# Altium PCB Display_driver_PCB.PcbDoc
Units mm, origin at the board's own origin, x right, y up, seen from the top; angles counter-clockwise.
Board outline 38.1 x 14.6 mm, 2 copper layers (Top Layer, Bottom Layer), stack 0.571 mm thick; 35 components, 82 nets, 116 pads, 14 vias.
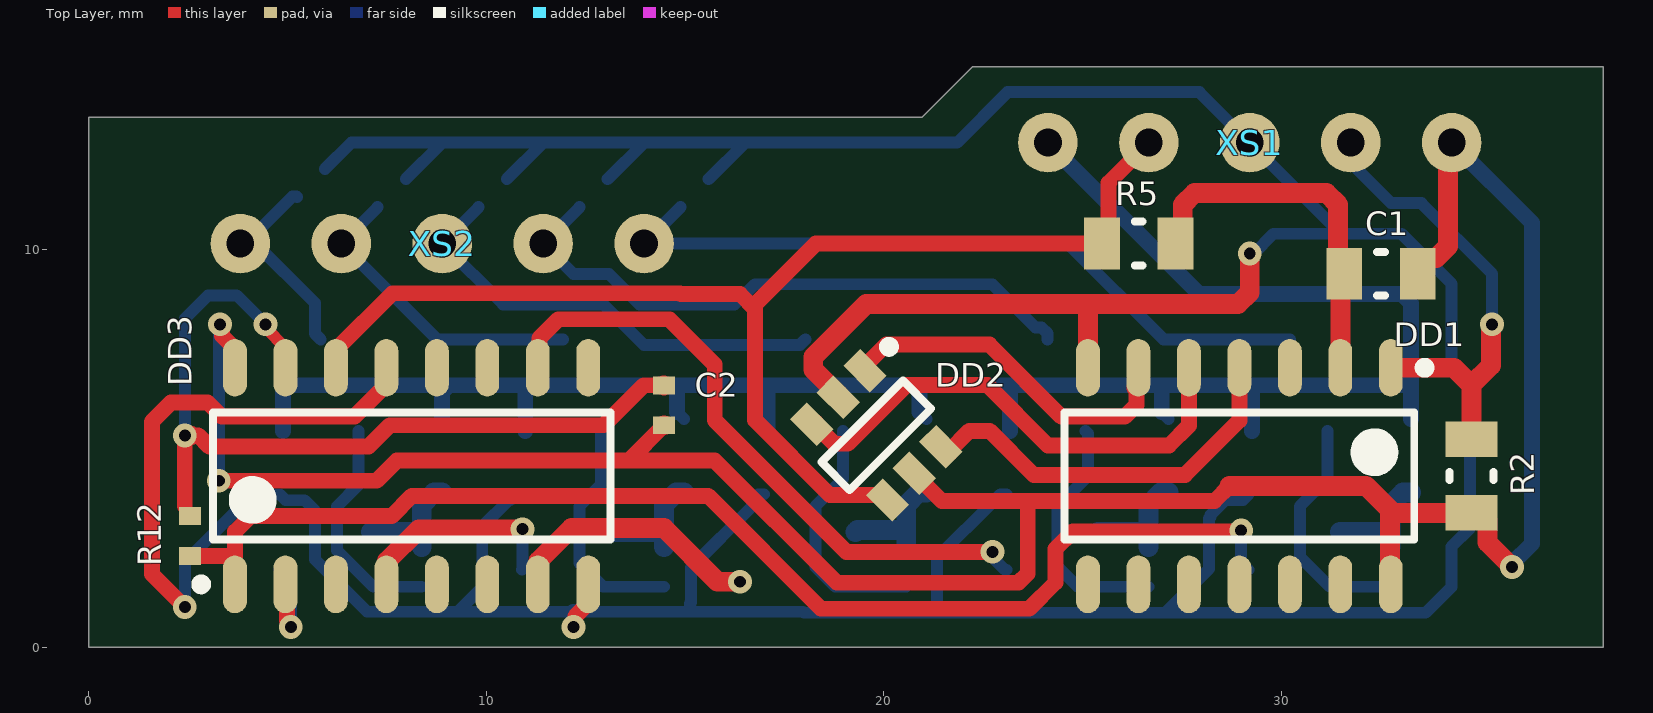
[diagram p0: Top Layer view]
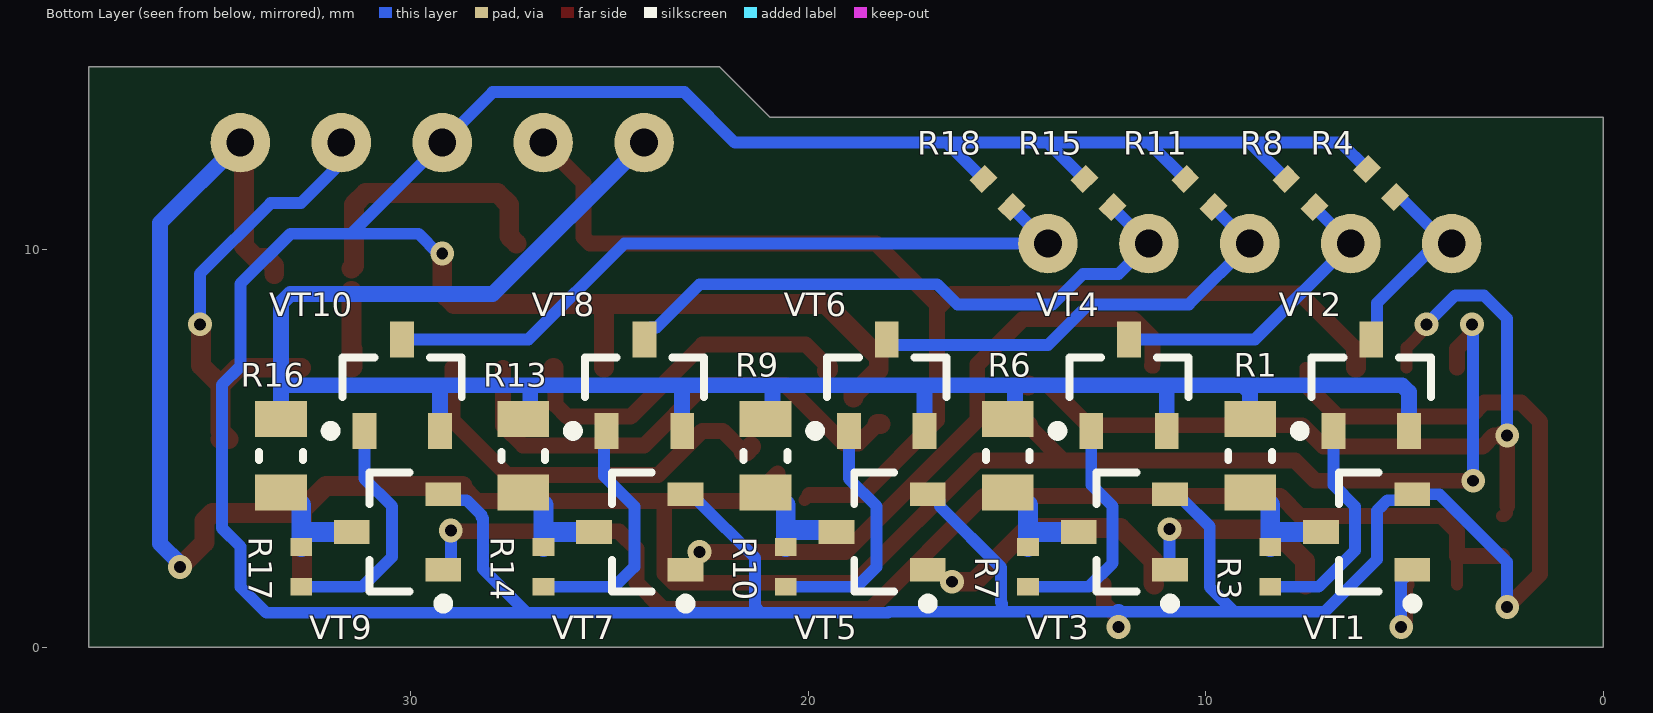
[diagram p1: Bottom Layer view, seen from below]

## Layer stack, top to bottom
Top Solder: solder mask 0.0102, Solder Resist, Dk 3.5
Top Layer: signal copper 0.0356
Dielectric 1: dielectric 0.5, FR-4, Dk 4.8
Bottom Layer: signal copper 0.0356
Bottom Solder: solder mask 0.0102, Solder Resist, Dk 3.5

## Board outline
0,0 0,13.335 20.32,13.335 20.955,13.335 22.225,14.605 38.1,14.605 38.1,0
cut-out: -25.4,-27.94 -25.146,-27.94 -25.146,-27.686 -25.4,-27.686
cut-out: -25.4,-27.94 -25.146,-27.94 -25.146,-27.686 -25.4,-27.686
cut-out: -25.4,-27.94 -25.146,-27.94 -25.146,-27.686 -25.4,-27.686

## Design rules (kind name [scope] priority, off if disabled: settings)
Clearance [All] p1: gap=0.254 ignorepadtopadclearanceinfootprint=FALSE
FanoutControl Fanout_LCC [All] p1 off: bgadir=Out bgaviamode=Centered fanoutstyle=Auto fanoutdirection=Alternating viagrid=0.025 // Protel DXP Scope 1 Expression Was: IsLCC   Fanout_LCC (Default Rule)
FanoutControl Fanout_BGA [All] p2 off: bgadir=Out bgaviamode=Centered fanoutstyle=Auto fanoutdirection=Alternating viagrid=0.025 // Protel DXP Scope 1 Expression Was: IsBGA   Fanout_BGA (Default Rule)
FanoutControl Fanout_SOIC [All] p3 off: bgadir=Out bgaviamode=Centered fanoutstyle=Auto fanoutdirection=Alternating viagrid=0.025 // Protel DXP Scope 1 Expression Was: IsSOIC   Fanout_SOIC (Default Rule)
FanoutControl Fanout_Default [All] p4: bgadir=Out bgaviamode=Centered fanoutstyle=Auto fanoutdirection=Alternating viagrid=0.025 // Fanout_Default (Default Rule)
FanoutControl Fanout_Small [All] p5 off: bgadir=Out bgaviamode=Centered fanoutstyle=Auto fanoutdirection=Alternating viagrid=0.025 // Protel DXP Scope 1 Expression Was: (CompPinCount < 5)   Fanout_Small (Default Rule)
PolygonConnect [All] p1: connectstyle=Relief reliefconductorwidth=0.254 reliefentries=4 polygonreliefangle="90 Angle" airgapwidth=0.254
RoutingVias [All] p1: holewidth=0.711 width=1.27 viastyle="Through Hole" minholewidth=0.711 minwidth=1.27 maxholewidth=0.711 maxwidth=1.27
SilkToSolderMaskClearance [All] p1 off: minsilkscreentomaskgap=0.254 clearancetoexposedcopper=TRUE // Protel DXP Scope 1 Expression Was: IsPad
SolderMaskExpansion [All] p1: expansion=0.102 istentingtop=FALSE
Width [All] p1: maxlimit=1 minlimit=0.15 preferedwidth=0.4
24 further rules are at their usual default settings.

## Components (designator, comment, footprint, x,y, rotation, side; value= is the part's Value field where it differs from the comment)
C1 "C0805" CHIP-0805 32.512,9.398 r180 top
C2 "C0805" CHIP-0402 14.47,6.088 r90 top
DD1 "CD4024" SOIC-14 28.948,4.31 r270 top
DD2 "74LVC1G11" SOT23-6 19.812,5.334 r315 top
DD3 "CD4017" SOIC-16 8.12,4.31 r90 top
R1 "R0805" CHIP-0805 8.882,4.818 r90 bottom
R2 "R0805" CHIP-0805 34.79,4.31 r270 top
R3 "R0805" CHIP-0402 8.374,2.024 r270 bottom
R4 "R0805" CHIP-0402 5.588,11.684 r225 bottom
R5 "R0805" CHIP-0805 26.416,10.16 r180 top
R6 "R0805" CHIP-0805 14.978,4.818 r90 bottom
R7 "R0805" CHIP-0402 14.47,2.024 r270 bottom
R8 "R0805" CHIP-0402 7.62,11.43 r225 bottom
R9 "R0805" CHIP-0805 21.074,4.818 r90 bottom
R10 "R0805" CHIP-0402 20.566,2.024 r270 bottom
R11 "R0805" CHIP-0402 10.16,11.43 r225 bottom
R12 "R0805" CHIP-0402 2.54,2.802 r270 top
R13 "R0805" CHIP-0805 27.17,4.818 r90 bottom
R14 "R0805" CHIP-0402 26.662,2.024 r270 bottom
R15 "R0805" CHIP-0402 12.7,11.43 r225 bottom
R16 "R0805" CHIP-0805 33.266,4.818 r90 bottom
R17 "R0805" CHIP-0402 32.758,2.024 r270 bottom
R18 "R0805" CHIP-0402 15.24,11.43 r225 bottom
VT1 "2N7000" SOT23-3 5.95,2.902 r0 bottom
VT2 "BC808" SOT23-3 5.834,6.596 r90 bottom
VT3 "2N7000" SOT23-3 12.046,2.902 r0 bottom
VT4 "BC808" SOT23-3 11.93,6.596 r90 bottom
VT5 "2N7000" SOT23-3 18.142,2.902 r0 bottom
VT6 "BC808" SOT23-3 18.026,6.596 r90 bottom
VT7 "2N7000" SOT23-3 24.238,2.902 r0 bottom
VT8 "BC808" SOT23-3 24.122,6.596 r90 bottom
VT9 "2N7000" SOT23-3 30.334,2.902 r0 bottom
VT10 "BC808" SOT23-3 30.218,6.596 r90 bottom
XS1 "Socket" SOCKET 24.13,12.7 r0 top
XS2 "Socket" SOCKET 3.81,10.16 r0 top

## Footprints (in the part's own frame and the unit in brackets; to place one, negate y for a bottom-side part, rotate by r counter-clockwise, add the part's x,y. Pads: shape width x height; smd on the part's side, far side on the other; paste and mask are expansions set on the pad)
CHIP-0402 [mm] "Chip Resistor, 2-Leads, Body 1,00x0,50mm, IPC Medium Density"
  rect 0.45x0.55 smd: 1(-0.5,0) 2(0.5,0)
  body extent -0.5,-0.25 0.5,0.25, height 0.35
CHIP-0805 [mm] "Chip Resistor, 2-Leads, Body 2,00x1,25mm, IPC Medium Density"
  rect 0.9x1.3 smd: 1(-0.925,0) 2(0.925,0)
  silkscreen extent -0.1,-0.55 0.1,0.55, body extent -1,-0.63 1,0.63, height 0.7
SOCKET [mm]
  round 1.5 hole 0.7: 1(0,0) 2(2.54,0) 3(5.08,0) 4(7.62,0) 5(10.16,0)
SOIC-14 [mm] "SOIC, 14-Leads, Body 8,65x3,90mm, Pitch 1,27mm, IPC Medium Density"
  oval 1.45x0.6 smd: 1(-2.725,3.81) 2(-2.725,2.54) 3(-2.725,1.27) 4(-2.725,0) 5(-2.725,-1.27) 6(-2.725,-2.54) 7(-2.725,-3.81) 8(2.725,-3.81) 9(2.725,-2.54) 10(2.725,-1.27) 11(2.725,0) 12(2.725,1.27) 13(2.725,2.54) 14(2.725,3.81)
  silkscreen extent -2.85,-4.4 1.6,4.79, body extent -2,-4.4 2,4.4, height 1.75
SOIC-16 [mm] "SOIC, 16-Leads, Body 9,90x3,90mm, Pitch 1,27mm, IPC Medium Density"
  oval 1.45x0.6 smd: 1(-2.725,4.445) 2(-2.725,3.175) 3(-2.725,1.905) 4(-2.725,0.635) 5(-2.725,-0.635) 6(-2.725,-1.905) 7(-2.725,-3.175) 8(-2.725,-4.445) 9(2.725,-4.445) 10(2.725,-3.175) 11(2.725,-1.905) 12(2.725,-0.635) 13(2.725,0.635) 14(2.725,1.905) 15(2.725,3.175) 16(2.725,4.445)
  silkscreen extent -2.85,-5 1.6,5.42, body extent -2,-5 2,5, height 1.75
SOT23-3 [mm] "SOT23, 3-Leads, Body 2,90x2,30mm, Pitch 0,95mm, IPC Medium Density"
  rect 0.9x0.6 smd: 1(-1.15,0.95) 2(-1.15,-0.95) 3(1.15,0)
  silkscreen extent -1.27,-1.5 0.7,1.92, body extent -0.7,-1.5 0.7,1.5, height 1.1
SOT23-6 [mm] "SOT23, 6-Leads, Body 2,85x2,80mm, Pitch 0,95mm, IPC Medium Density"
  rect 0.95x0.6 smd: 1(-1.35,0.95) 2(-1.35,0) 3(-1.35,-0.95) 4(1.35,-0.95) 5(1.35,0) 6(1.35,0.95)
  silkscreen extent -1.47,-1.45 0.5,1.92, body extent -0.88,-1.45 0.88,1.45, height 1.1

## Via types
v1: diameter 0.6, hole 0.3, Top Layer to Bottom Layer, 14 vias

## Nets (pads, with @x,y where several pads share a name; then routed paths per layer and width w, separated by ;. In a path a pad name is that pad's centre, name@x,y a point inside that pad or via, vN(x,y) a via of type N, cw(c..) or ccw(c..) an arc to the next point about the centre after c; other vN are vias at no path point)
+3V3: 
+3V3_D: C1.1 C2.1 DD1.14 DD2.5 DD3.16 R2.2 XS1.5 | length 64.1
  Top Layer w0.4: v1(3.269,4.191) 7.239,4.191 7.747,4.699 13.581,4.699 ; v1(3.302,8.128) 3.35,8.08 3.35,7.839 3.675,7.514 DD3.16 ; C2.1 13.581,4.699 ; DD2.5 21.463,3.683 23.622,3.683 ; 28.702,4.064 28.321,3.683 27.233,3.683 23.622,3.683 ; 13.581,4.699 15.748,4.699 18.823,1.624 23.388,1.624 23.622,1.859 23.622,3.683
  Top Layer w0.5: 28.702,4.064 32.131,4.064 32.81,3.385 R2.2 34.99,3.385 35.19,3.185 35.19,2.64 v1(35.806,2.024) ; 32.739,3.314 32.739,1.604 DD1.14 ; C1.1 33.437,9.598 33.637,9.798 33.902,9.798 34.195,10.091 34.195,12.605 XS1.5
  Bottom Layer w0.3: v1(3.269,4.191) 3.269,8.095 v1(3.302,8.128) ; v1(35.806,2.024) v1@35.806,2.104
  Bottom Layer w0.4: XS1.5 36.314,10.676 36.314,2.612 v1@35.806,2.104
+3V3_S: 
+5: 
+5_D: R1.2 R6.2 R9.2 R13.2 R16.2 VT2.2 VT4.2 VT6.2 VT8.2 VT10.2 XS1.1 | length 51.6
  Bottom Layer w0.3: 10.914,6.596 10.98,6.53 ; R6.2@14.802,5.919 R6.2 ; 17.01,6.596 17.076,6.53 ; R9.2@20.898,5.919 R9.2 ; 23.106,6.596 23.172,6.53 ; R13.2@26.994,5.919 R13.2 ; 29.202,6.596 29.268,6.53
  Bottom Layer w0.4: VT2.2 4.884,6.42 5.06,6.596 8.882,6.596 9.058,6.596 ; R1.2 8.882,6.42 9.058,6.596 ; VT4.2 10.98,6.53 ; R6.2@14.802,5.919 14.802,6.596 ; VT6.2 17.076,6.53 ; R9.2@20.898,5.919 20.898,6.596 ; VT8.2 23.172,6.53 ; XS1.1 27.94,8.89 33.032,8.89 33.266,8.656 33.266,6.596 ; R13.2@26.994,5.919 26.994,6.596 ; VT10.2 29.268,6.53 ; R16.2 33.266,6.596 ; 9.058,6.596 10.914,6.596 14.802,6.596 ; 14.802,6.596 17.01,6.596 20.898,6.596 ; 20.898,6.596 23.106,6.596 26.994,6.596 ; 26.994,6.596 29.202,6.596 33.266,6.596
+5_S: 
ADC_IN: 
BAT_DIV: 
BAT_IN: 
BATTERY: 
Buttons: 
BYTE: 
CLK: DD1.1 R2.1 XS1.4 | length 12.3
  Top Layer w0.5: XS1.4 XS1.4@31.892,12.842 ; DD1.1 34.351,7.035 34.785,6.601 ; R2.1 34.59,5.235 34.785,5.43 34.785,6.601 ; v1(35.306,8.128) 35.277,8.099 35.277,7.094 34.785,6.601
  Bottom Layer w0.3: XS1.4 31.93,12.52 31.93,12.012 32.766,11.176 33.528,11.176 35.306,9.398 v1(35.306,8.128)
CLK_BUS: 
CLK_PROG: 
Col1: R4.2 VT2.3 XS2.1 | length 5.4
  Bottom Layer w0.3: R4.2 5.224,11.341 5.118,11.341 3.937,10.16 XS2.1 4.191,10.16 5.684,8.667 5.684,7.896 VT2.3
Col2: R8.2 VT4.3 XS2.2 | length 7.9
  Bottom Layer w0.3: R8.2 XS2.2 8.764,7.746 VT4.3
Col3: R11.2 VT6.3 XS2.3 | length 11.5
  Bottom Layer w0.3: R11.2 XS2.3 10.422,8.628 12.946,8.628 13.962,7.612 17.892,7.612 VT6.3
Col4: R15.2 VT8.3 XS2.4 | length 15.5
  Bottom Layer w0.3: R15.2 XS2.4 12.192,9.398 13.083,9.398 13.853,8.628 16.248,8.628 16.756,9.136 22.732,9.136 23.822,8.046 23.972,8.046 24.122,7.896 VT8.3
Col5: R18.2 VT10.3 XS2.5 | length 18.5
  Bottom Layer w0.3: R18.2 XS2.5 24.63,10.16 27.044,7.746 VT10.3
D_OUT: 
DATA: 
GATE: 
Gate1: DD3.2 VT1.1 | length 2.7
  Top Layer w0.4: DD3.2 4.983,1.547 4.983,0.672 5.08,0.576 v1(5.08,0.508)
  Bottom Layer w0.3: VT1.1 5.08,1.672 v1(5.08,0.508)
Gate2: DD3.4 VT3.1 | length 5.4
  Top Layer w0.5: DD3.4 7.504,1.604 7.504,2.17 8.307,2.973 v1(10.914,2.973)
  Bottom Layer w0.3: VT3.1 10.914,1.97 v1(10.914,2.973)
Gate3: DD3.7 VT5.1 | length 6.6
  Top Layer w0.5: DD3.7 11.314,1.604 11.314,2.17 12.145,3.001 14.469,3.001 15.819,1.651 v1(16.383,1.651)
Gate4: DD3.10 VT7.1 | length 16.2
  Top Layer w0.3: DD3.10 DD3.10@11.352,7.092
  Top Layer w0.4: DD3.10@11.352,7.092 11.333,7.112 11.333,7.777 11.811,8.255 14.605,8.255 15.748,7.112 15.748,5.715 19.06,2.403 v1(22.733,2.403)
  Bottom Layer w0.3: v1(22.733,2.403) 22.733,2.267 23.048,1.952 VT7.1
Gate5: DD3.1 R12.2 VT9.1 | length 31.7
  Top Layer w0.3: DD3.1 DD3.1@3.675,2.302
  Top Layer w0.4: R12.2 3.675,2.302 3.675,2.913 4.064,3.302 7.62,3.302 8.128,3.81 15.581,3.81 18.421,0.97 23.659,0.97 24.321,1.632 24.321,2.477 24.765,2.921 v1@28.956,2.921
  Bottom Layer w0.3: v1(28.994,2.94) 28.994,2.102 29.144,1.952 VT9.1
GATE_S: 
GND: 
GND_D: DD1.7 DD2.2 DD3.8 DD3.13 R4.1 R8.1 R11.1 R15.1 R18.1 VT1.2 VT3.2 VT5.2 VT7.2 VT9.2 XS1.3 | length 127.2
  Top Layer w0.3: DD3.13@7.485,6.61 DD3.13
  Top Layer w0.4: v1(2.413,1.016) 1.584,1.845 1.584,5.677 2.07,6.163 2.985,6.163 3.342,5.806 6.681,5.806 DD3.13@7.485,6.61 ; v1@12.24,0.781 12.565,1.106 DD3.8
  Top Layer w0.5: DD2.2 18.857,6.359 18.224,6.992 18.224,7.302 19.558,8.636 28.917,8.636 29.21,8.929 v1(29.21,9.906) ; DD1.7 25.138,8.343 ; XS1.3@29.21,12.938 XS1.3 XS1.3@29.288,12.622
  Bottom Layer w0.3: v1(2.413,1.016) 2.413,2.144 4.121,3.852 VT1.2 4.95,3.702 5.426,3.702 5.579,3.549 5.692,3.436 5.692,2.205 7.002,0.895 9.277,0.895 ; R4.1 6.604,12.7 8.89,12.7 ; R8.1 8.89,12.7 ; R11.1 11.43,12.7 ; VT3.2 10.746,3.852 10.596,3.702 10.56,3.702 9.898,3.04 9.898,1.516 9.277,0.895 ; R15.1 13.97,12.7 ; R18.1 16.51,12.7 ; VT5.2 16.842,3.852 16.692,3.702 16.692,3.552 15.149,2.009 15.149,1.132 15.119,1.102 15.119,0.895 ; VT7.2 22.938,3.852 22.788,3.702 21.336,2.25 21.336,1.016 21.19,0.87 ; VT9.2 29.034,3.702 28.594,3.702 28.224,3.332 28.224,3.276 28.186,3.238 28.186,1.977 27.079,0.87 ; v1(29.21,9.906) 29.305,9.906 29.805,10.406 31.504,10.406 ; 8.89,12.7 11.43,12.7 ; 9.277,0.895 12.198,0.895 15.119,0.895 ; 11.43,12.7 13.97,12.7 ; 13.97,12.7 16.51,12.7 ; 15.119,0.895 17.965,0.895 17.99,0.87 21.19,0.87 ; 16.51,12.7 21.844,12.7 23.114,13.97 27.94,13.97 XS1.3 31.504,10.406 ; 21.19,0.87 27.079,0.87 ; 27.079,0.87 33.636,0.87 34.282,1.516 34.282,2.532 34.752,3.002 34.752,6.604 34.29,7.066 34.29,9.144 33.028,10.406 31.504,10.406
  Bottom Layer w0.4: v1(12.192,0.508) 12.198,0.514 12.198,0.895
GND_S: 
HCLK: 
MISO_PROG: 
MOSI_PROG: 
NetC1_2: C1.2 DD1.2 R5.1 | length 9.2
  Top Layer w0.5: R5.1 27.525,10.344 27.525,11.137 27.817,11.43 31.141,11.43 31.434,11.137 31.434,9.593 C1.2@31.496,9.53 ; DD1.2@31.469,7.054 DD1.2@31.469,7.506 ; DD1.2 C1.2@31.488,8.972
NetC2_2: C2.2 DD3.15 R12.1 | length 21.7
  Top Layer w0.3: 2.413,3.553 2.415,3.551 2.415,3.377 2.49,3.302 R12.1 ; v1(4.445,8.128) 4.445,8.041 4.945,7.541 DD3.15
  Top Layer w0.4: 2.413,3.553 v1(2.413,5.334) ; v1@2.54,5.334 2.748,5.334 3.03,5.052 7.034,5.052 7.57,5.588 12.954,5.588 13.962,6.596 C2.2@14.462,6.596
  Top Layer w0.5: v1(2.413,5.334) v1@2.54,5.334 ; C2.2@14.462,6.596 C2.2
  Bottom Layer w0.3: v1(2.413,5.334) 2.413,8.27 3,8.857 3.716,8.857 v1(4.445,8.128)
NetC3_2: 
NetC7_1: 
NetC8_2: 
NetDA1_1: 
NetDA1_4: 
NetDA1_5: 
NetDA2_1: 
NetDA2_3: 
NetDD1_4: DD1.4 DD2.6 | length 10.1
  Top Layer w0.4: DD2.6@21.633,4.927 22.153,5.448 22.666,5.448 23.777,4.337 27.578,4.337 28.948,5.707 DD1.4
  Top Layer w0.5: DD2.6 21.562,4.927 DD2.6@21.633,4.927
NetDD1_5: DD1.5 DD2.3 | length 12.6
  Top Layer w0.4: DD2.3@18.256,5.617 18.75,5.123 19.093,5.123 20.574,6.604 22.606,6.604 24.13,5.08 27.178,5.08 27.678,5.58 DD1.5
  Top Layer w0.5: DD2.3 DD2.3@18.256,5.617
NetDD1_6: DD1.6 DD2.1 | length 9
  Top Layer w0.4: DD2.1@19.503,7.057 20.066,7.62 22.656,7.62 24.47,5.806 26.065,5.806 26.358,6.099 DD1.6@26.358,6.533
  Top Layer w0.5: DD2.1@19.503,7.057 19.503,6.986 DD2.1 ; DD1.6@26.358,6.533 26.408,6.583 DD1.6
NetDD4_1: 
NetDD4_2: 
NetDD7_5: 
NetDD7_6: 
NetDD7_7: 
NetDD8_9: 
NetG1_1: 
NetHG1_1: 
NetHG1_2: 
NetHG1_3: 
NetHG1_4: 
NetHG1_5: 
NetHL1_1: 
NetR1_1: R1.1 R3.1 VT1.3 | length 3
  Bottom Layer w0.5: VT1.3 8.221,2.902 8.374,3.054 ; R3.1 8.374,3.054 ; R1.1 8.682,3.893 8.374,3.585 8.374,3.054
NetR3_2: R3.2 VT2.1 | length 5.7
  Bottom Layer w0.3: VT2.1 6.784,4.086 6.246,3.548 6.246,2.435 7.157,1.524 R3.2
NetR6_1: R6.1 R7.1 VT3.3 | length 3
  Bottom Layer w0.5: VT3.3 14.317,2.902 14.47,3.054 ; R7.1 14.47,3.054 ; R6.1 14.778,3.893 14.47,3.585 14.47,3.054
NetR7_2: R7.2 VT4.1 | length 5.9
  Bottom Layer w0.3: VT4.1 12.88,4.086 12.342,3.548 12.342,2.435 12.342,2.12 12.938,1.524 R7.2
NetR9_1: R9.1 R10.1 VT5.3 | length 3
  Bottom Layer w0.5: VT5.3 19.342,2.952 20.463,2.952 20.566,3.054 ; R10.1 20.566,3.054 ; R9.1 20.874,3.893 20.566,3.585 20.566,3.054
NetR10_2: R10.2 VT6.1 | length 6.2
  Bottom Layer w0.3: VT6.1 18.976,4.244 18.28,3.548 18.28,2.024 18.78,1.524 R10.2
NetR13_1: R13.1 R14.1 VT7.3 | length 3
  Bottom Layer w0.5: VT7.3 26.509,2.902 26.662,3.054 ; R14.1 26.662,3.054 ; R13.1 26.97,3.893 26.662,3.585 26.662,3.054
NetR14_2: R14.2 VT8.1 | length 6.3
  Bottom Layer w0.3: VT8.1 25.138,5.38 25.138,4.31 24.376,3.548 24.376,2.024 24.876,1.524 R14.2
NetR16_1: R16.1 R17.1 VT9.3 | length 3
  Bottom Layer w0.5: VT9.3 32.605,2.902 32.758,3.054 ; R17.1 32.758,3.054 ; R16.1 33.066,3.893 32.758,3.585 32.758,3.054
NetR17_2: R17.2 VT10.1 | length 6.1
  Bottom Layer w0.3: VT10.1 31.168,4.244 30.472,3.548 30.472,2.278 31.226,1.524 R17.2
NetR21_2: 
NetR27_1: 
NetXS5_2: 
NetXS5_4: 
PWM: 
PWM_D: DD2.4 DD3.14 R5.2 XS1.2 | length 31.2
  Top Layer w0.3: DD2.4@19.971,3.831 DD2.4
  Top Layer w0.4: DD3.14@6.215,7.485 7.639,8.909 14.876,8.909 14.895,8.89 16.383,8.89 16.764,8.509 16.764,5.715 18.648,3.831 DD2.4@19.971,3.831 ; 16.7,8.572 18.288,10.16 R5.2 25.654,10.323 25.654,11.684 XS1.2
  Top Layer w0.5: DD3.14 DD3.14@6.215,7.485
RESET: 
SCL: 
SCLK: 
SDA: 
SWITCH: 
pads on no net: DD1.3 DD1.8 DD1.9 DD1.10 DD1.11 DD1.12 DD1.13 DD3.3 DD3.5 DD3.6 DD3.9 DD3.11 DD3.12

## Silkscreen, mask and mechanical layers (free items; w line width, h text height)
Mechanical 15:
  lines w0.2: 0,0 0,13.335 20.32,13.335 20.955,13.335 22.225,14.605 22.86,14.605 38.1,14.605 38.1,1.778 38.1,0 0,0